# Altium PCB PCB_SATA_SFP.PcbDoc (part 2 of 2)
Units mil, origin at the board's own origin, x right, y up, seen from the top; angles counter-clockwise.
Board outline 2874.02 x 708.66 mil, 4 copper layers (Top Layer, MidPlane_1, MidPlane_2, Bottom Layer), stack 61.899 mil thick; 52 components, 38 nets, 211 pads, 119 vias.
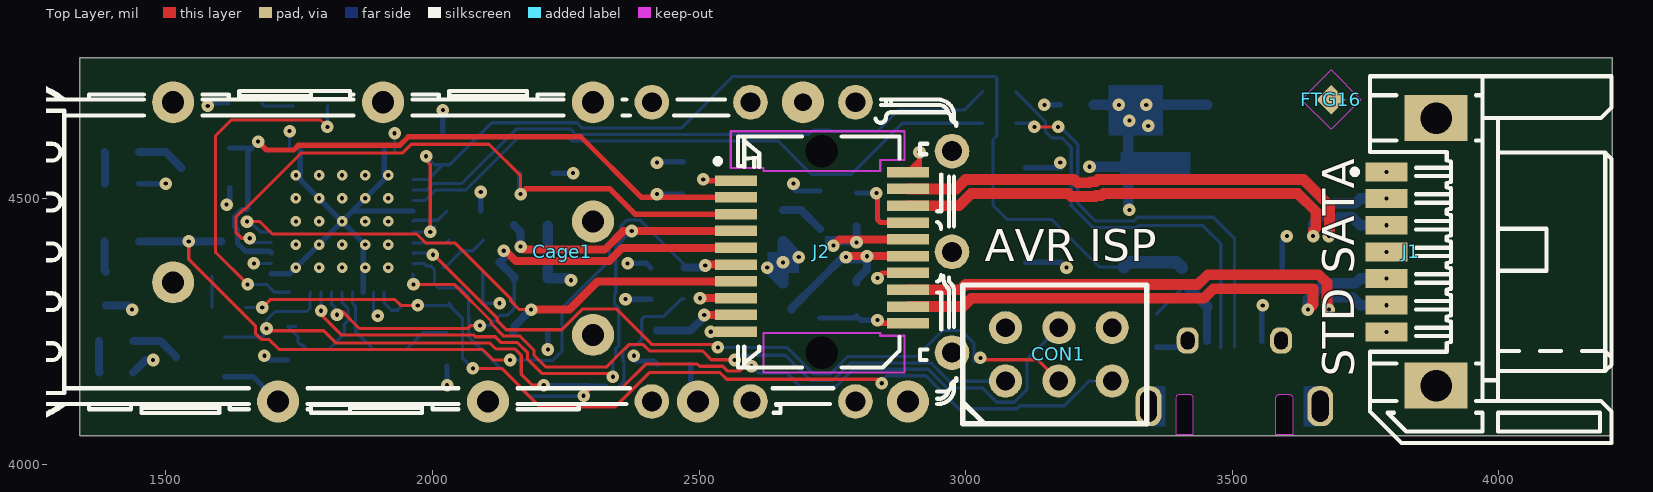
[diagram p0: Top Layer view]

## Via types
v1: diameter 23.62, hole 7.87, Top Layer to Bottom Layer, tented both sides, 94 vias
v2: diameter 19.68, hole 7.87, Top Layer to Bottom Layer, tented both sides, 25 vias

## Nets (pads, with @x,y where several pads share a name; then routed paths per layer and width w, separated by ;. In a path a pad name is that pad's centre, name@x,y a point inside that pad or via, vN(x,y) a via of type N, cw(c..) or ccw(c..) an arc to the next point about the centre after c; other vN are vias at no path point) (continued)
copper on no net: (continued)
  Top Layer w15: 1094.42,5982.83 1504.34,5982.83 2434.08,5982.83 3293.85,5982.83 3943.68,5982.83 4513.55,5982.83 5633.23,5982.83 ; 1094.42,6102.83 1504.34,6102.83 2434.08,6102.83 3293.85,6102.83 3943.68,6102.83 4513.55,6102.83 5633.23,6102.83 ; 1094.42,6222.83 1504.34,6222.83 2434.08,6222.83 3293.85,6222.83 3943.68,6222.83 4513.55,6222.83 5633.23,6222.83 ; 1094.42,6342.83 1504.34,6342.83 2434.08,6342.83 3293.85,6342.83 3943.68,6342.83 4513.55,6342.83 5633.23,6342.83 ; 1094.42,6462.83 1504.34,6462.83 2434.08,6462.83 3293.85,6462.83 3943.68,6462.83 4513.55,6462.83 5633.23,6462.83 ; 1094.42,6582.83 1504.34,6582.83 2434.08,6582.83 3293.85,6582.83 3943.68,6582.83 4513.55,6582.83 5633.23,6582.83 ; 1094.42,6702.83 1504.34,6702.83 2434.08,6702.83 3293.85,6702.83 3943.68,6702.83 4513.55,6702.83 5633.23,6702.83 ; 1094.42,6822.83 1504.34,6822.83 2434.08,6822.83 3293.85,6822.83 3943.68,6822.83 4513.55,6822.83 5633.23,6822.83 ; 1094.42,6942.83 1504.34,6942.83 2434.08,6942.83 3293.85,6942.83 3943.68,6942.83 4513.55,6942.83 5633.23,6942.83 ; 1094.42,7062.83 1504.34,7062.83 2434.08,7062.83 3293.85,7062.83 3943.68,7062.83 4513.55,7062.83 5633.23,7062.83 ; 1094.42,7182.83 5633.23,7182.83 ; 1504.34,7302.83 1504.34,5862.83 ; 2434.08,7302.83 2434.08,5862.83 ; 3293.85,7302.83 3293.85,5862.83 ; 3943.68,7302.83 3943.68,5862.83 ; 4513.55,7302.83 4513.55,5862.83 ; 1504.34,5862.83 2434.08,5862.83 ; 1504.34,5862.83 1094.42,5862.83 1094.42,7302.83 5633.23,7302.83 5633.23,5862.83 4513.55,5862.83 ; 2434.08,5862.83 3293.85,5862.83 ; 3293.85,5862.83 3943.68,5862.83 ; 3943.68,5862.83 4513.55,5862.83

## Polygon pours and split planes (outlines as drawn)
GND on MidPlane_1 (split plane): 4192.5,4075.21 3634.27,4075.21 3634.27,4124.02 3634.27,4125.58 3634.13,4126.99 3633.88,4129.5 3632.74,4133.27 3631.54,4136.17 3630.48,4138.14 3629.68,4139.64 3629.25,4140.17 3627.18,4142.69 3624.97,4144.9 3622.97,4146.54 3621.92,4147.4 3620.43,4148.2 3618.45,4149.26 3615.55,4150.46 3612.9,4151.26 3611.78,4151.6 3609.27,4151.85 3607.86,4151.99 3587.01,4151.99 3585.61,4151.85 3583.09,4151.6 3579.32,4150.46 3576.43,4149.26 3574.45,4148.2 3572.96,4147.4 3572.43,4146.97 3569.91,4144.9 3567.7,4142.69 3565.74,4140.31 3565.2,4139.64 3563.58,4136.61 3563.34,4136.17 3562.14,4133.27 3561.69,4131.79 3561,4129.5 3560.61,4125.58 3560.61,4124.02 3560.61,4075.21 3447.26,4075.21 3447.26,4124.02 3447.26,4125.58 3447.12,4126.99 3446.87,4129.5 3445.73,4133.27 3444.53,4136.17 3443.47,4138.14 3442.67,4139.64 3442.24,4140.17 3440.18,4142.69 3437.96,4144.9 3435.96,4146.54 3434.92,4147.4 3434.91,4147.4 3433.42,4148.2 3431.44,4149.26 3428.55,4150.46 3425.9,4151.26 3424.78,4151.6 3422.26,4151.85 3420.86,4151.99 3400.01,4151.99 3398.6,4151.85 3396.09,4151.6 3392.32,4150.46 3389.42,4149.26 3387.44,4148.2 3385.95,4147.4 3385.42,4146.97 3382.9,4144.9 3380.69,4142.69 3378.73,4140.31 3378.19,4139.64 3376.57,4136.61 3376.33,4136.17 3375.13,4133.27 3374.68,4131.79 3373.99,4129.5 3373.6,4125.58 3373.6,4124.02 3373.6,4075.21 1358.68,4075.21 1358.68,4743.68 4192.5,4743.68
GND on MidPlane_2 (split plane): 4192.5,4075.21 3634.27,4075.21 3634.27,4124.02 3634.27,4125.58 3634.13,4126.99 3633.88,4129.5 3632.74,4133.27 3631.54,4136.17 3630.48,4138.14 3629.68,4139.64 3629.25,4140.17 3627.18,4142.69 3624.97,4144.9 3622.97,4146.54 3621.92,4147.4 3620.43,4148.2 3618.45,4149.26 3615.55,4150.46 3612.9,4151.26 3611.78,4151.6 3609.27,4151.85 3607.86,4151.99 3587.01,4151.99 3585.61,4151.85 3583.09,4151.6 3579.32,4150.46 3576.43,4149.26 3574.45,4148.2 3572.96,4147.4 3572.43,4146.97 3569.91,4144.9 3567.7,4142.69 3565.74,4140.31 3565.2,4139.64 3563.58,4136.61 3563.34,4136.17 3562.14,4133.27 3561.69,4131.79 3561,4129.5 3560.61,4125.58 3560.61,4124.02 3560.61,4075.21 3447.26,4075.21 3447.26,4124.02 3447.26,4125.58 3447.12,4126.99 3446.87,4129.5 3445.73,4133.27 3444.53,4136.17 3443.47,4138.14 3442.67,4139.64 3442.24,4140.17 3440.18,4142.69 3437.96,4144.9 3435.96,4146.54 3434.92,4147.4 3434.91,4147.4 3433.42,4148.2 3431.44,4149.26 3428.55,4150.46 3425.9,4151.26 3424.78,4151.6 3422.26,4151.85 3420.86,4151.99 3405.1,4151.99 3405.1,4354.59 3527.23,4476.71 3528.33,4478.36 3528.72,4480.31 3528.72,4743.68 4192.5,4743.68
P3V3 on MidPlane_2 (split plane): 3518.52,4482.43 3396.4,4360.3 3395.3,4358.65 3394.91,4356.7 3394.91,4151.24 3392.32,4150.46 3389.42,4149.26 3387.44,4148.2 3385.95,4147.4 3385.42,4146.97 3382.9,4144.9 3380.69,4142.69 3378.73,4140.31 3378.19,4139.64 3376.57,4136.61 3376.33,4136.17 3375.13,4133.27 3374.68,4131.79 3373.99,4129.5 3373.6,4125.58 3373.6,4124.02 3373.6,4075.21 1358.68,4075.21 1358.68,4743.68 3518.52,4743.68

## Other copper
Top Layer:
  text "Layer" at 1154.42,7212.83 h60
  text "Name" at 1564.34,7212.83 h60
  text "Material" at 2494.08,7212.83 h60
  text "Thickness" at 3353.85,7212.83 h60
  text "Constant" at 4003.68,7212.83 h60
  text "Board Layer Stack" at 4573.55,7212.83 h60
  text "1" at 1154.42,7092.83 h60
  text "Top Overlay" at 1564.34,7092.83 h60
  text "2" at 1154.42,6972.83 h60
  text "Top Solder" at 1564.34,6972.83 h60
  text "Solder Resist" at 2494.08,6972.83 h60
  text "0.010mm" at 3353.85,6972.83 h60
  text "3.5" at 4003.68,6972.83 h60
  text "3" at 1154.42,6852.83 h60
  text "Top Layer" at 1564.34,6852.83 h60
  text "Copper" at 2494.08,6852.83 h60
  text "0.036mm" at 3353.85,6852.83 h60
  text "4" at 1154.42,6732.83 h60
  text "Dielectric1" at 1564.34,6732.83 h60
  text "FR-4" at 2494.08,6732.83 h60
  text "0.360mm" at 3353.85,6732.83 h60
  text "4.8" at 4003.68,6732.83 h60
  text "5" at 1154.42,6612.83 h60
  text "MidPlane_1" at 1564.34,6612.83 h60
  text "Copper" at 2494.08,6612.83 h60
  text "0.036mm" at 3353.85,6612.83 h60
  text "6" at 1154.42,6492.83 h60
  text "Dielectric3" at 1564.34,6492.83 h60
  text "FR-4" at 2494.08,6492.83 h60
  text "0.710mm" at 3353.85,6492.83 h60
  text "4.8" at 4003.68,6492.83 h60
  text "7" at 1154.42,6372.83 h60
  text "MidPlane_2" at 1564.34,6372.83 h60
  text "Copper" at 2494.08,6372.83 h60
  text "0.036mm" at 3353.85,6372.83 h60
  text "8" at 1154.42,6252.83 h60
  text "Dielectric2" at 1564.34,6252.83 h60
  text "FR-4" at 2494.08,6252.83 h60
  text "0.360mm" at 3353.85,6252.83 h60
  text "4.8" at 4003.68,6252.83 h60
  text "9" at 1154.42,6132.83 h60
  text "Bottom Layer" at 1564.34,6132.83 h60
  text "Copper" at 2494.08,6132.83 h60
  text "0.036mm" at 3353.85,6132.83 h60
  text "10" at 1154.42,6012.83 h60
  text "Bottom Solder" at 1564.34,6012.83 h60
  text "Solder Resist" at 2494.08,6012.83 h60
  text "0.010mm" at 3353.85,6012.83 h60
  text "3.5" at 4003.68,6012.83 h60
  text "11" at 1154.42,5892.83 h60
  text "Bottom Overlay" at 1564.34,5892.83 h60
Bottom Layer:
  rectangle net P3V3: 3267.72,4618.11 3370.08,4712.6
  rectangle net P3V3: 3290.35,4535.17 3421.26,4586.61
  rectangle net NetC1_2: 2765.75,4377.95 2814.96,4397.64
  rectangle net NetC3_2: 2736.22,4411.42 2807.09,4429.13
  rectangle net P3V3: 2627.95,4360.24 2687.01,4399.61
MidPlane_2 (plane layer: these items are gaps in the copper):
  lines w10: 3400.01,4143.7 3400.01,4356.7 3523.62,4480.31 3523.62,4759.84 3515.75,4767.72

## Silkscreen, mask and mechanical layers (free items; w line width, h text height)
Top Overlay:
  text "AVR ISP" at 3035.43,4381.89 h60
  text "STD SATA" at 3728.35,4165.35 h60 r90
Bottom Overlay:
  text "Tx" at 1791.34,4701.18 h30
  text "FAULT" at 1488.19,4618.11 h30
  text "CROSSOVER" at 3728.35,4614.17 h50 r90
  text "PRESENT" at 1559.06,4448.82 h30
  text "Rx" at 2181.1,4385.83 h30
  text "LOS" at 1527.56,4251.97 h30
Outline:
  the board outline again, w10
Dimensions:
  lines w5: 1046.41,4317.42 1062.41,4317.42 ; 1046.41,4365.42 1054.41,4377.42 1054.41,4317.42 ; 1088.31,4326.42 1092.31,4321.42 1097.01,4318.42 1103.01,4317.42 1109.01,4319.42 1113.61,4323.42 1117.01,4330.42 1117.61,4338.42 1116.31,4346.42 1113.01,4351.42 1108.31,4355.42 1103.61,4356.42 1099.01,4355.42 1093.01,4351.42 1095.01,4377.42 1113.01,4377.42

## Text inside footprints (layer, text, board x,y; h text height)
Cage1: Drill Drawing "PRESS-FIT TECHNOLOGY" at 1572.83,4328.74 h39.37; Drill Drawing "10x diam. 1.05mm +/-0.05" at 1462.6,4502.95 h39.37; Drill Drawing "9x diam. 0.95mm +/-0.05" at 1486.22,4415.35 h39.37; Drill Drawing "1x diam. 0.85mm +/-0.05" at 1494.09,4576.77 h39.37
J3: Drill Drawing "0.85" at 3563.07,3948.2 h39.37; Drill Drawing "1.87" at 3518.08,4050.74 h39.37 r270; Drill Drawing "r0.2" at 3413.39,4169.29 h39.37; Mechanical 8 "PCB end" at 3673.23,4020.67 h19.68